# Altium PCB PCB_old.PcbDoc
Units mm, origin at the board's own origin, x right, y up, seen from the top; angles counter-clockwise.
Board outline 95.12 x 100.58 mm, 2 copper layers (Top Layer, Bottom Layer); 14 components, 22 nets, 91 pads, 8 vias.
Unrouted connection lines stored in the file: 22.
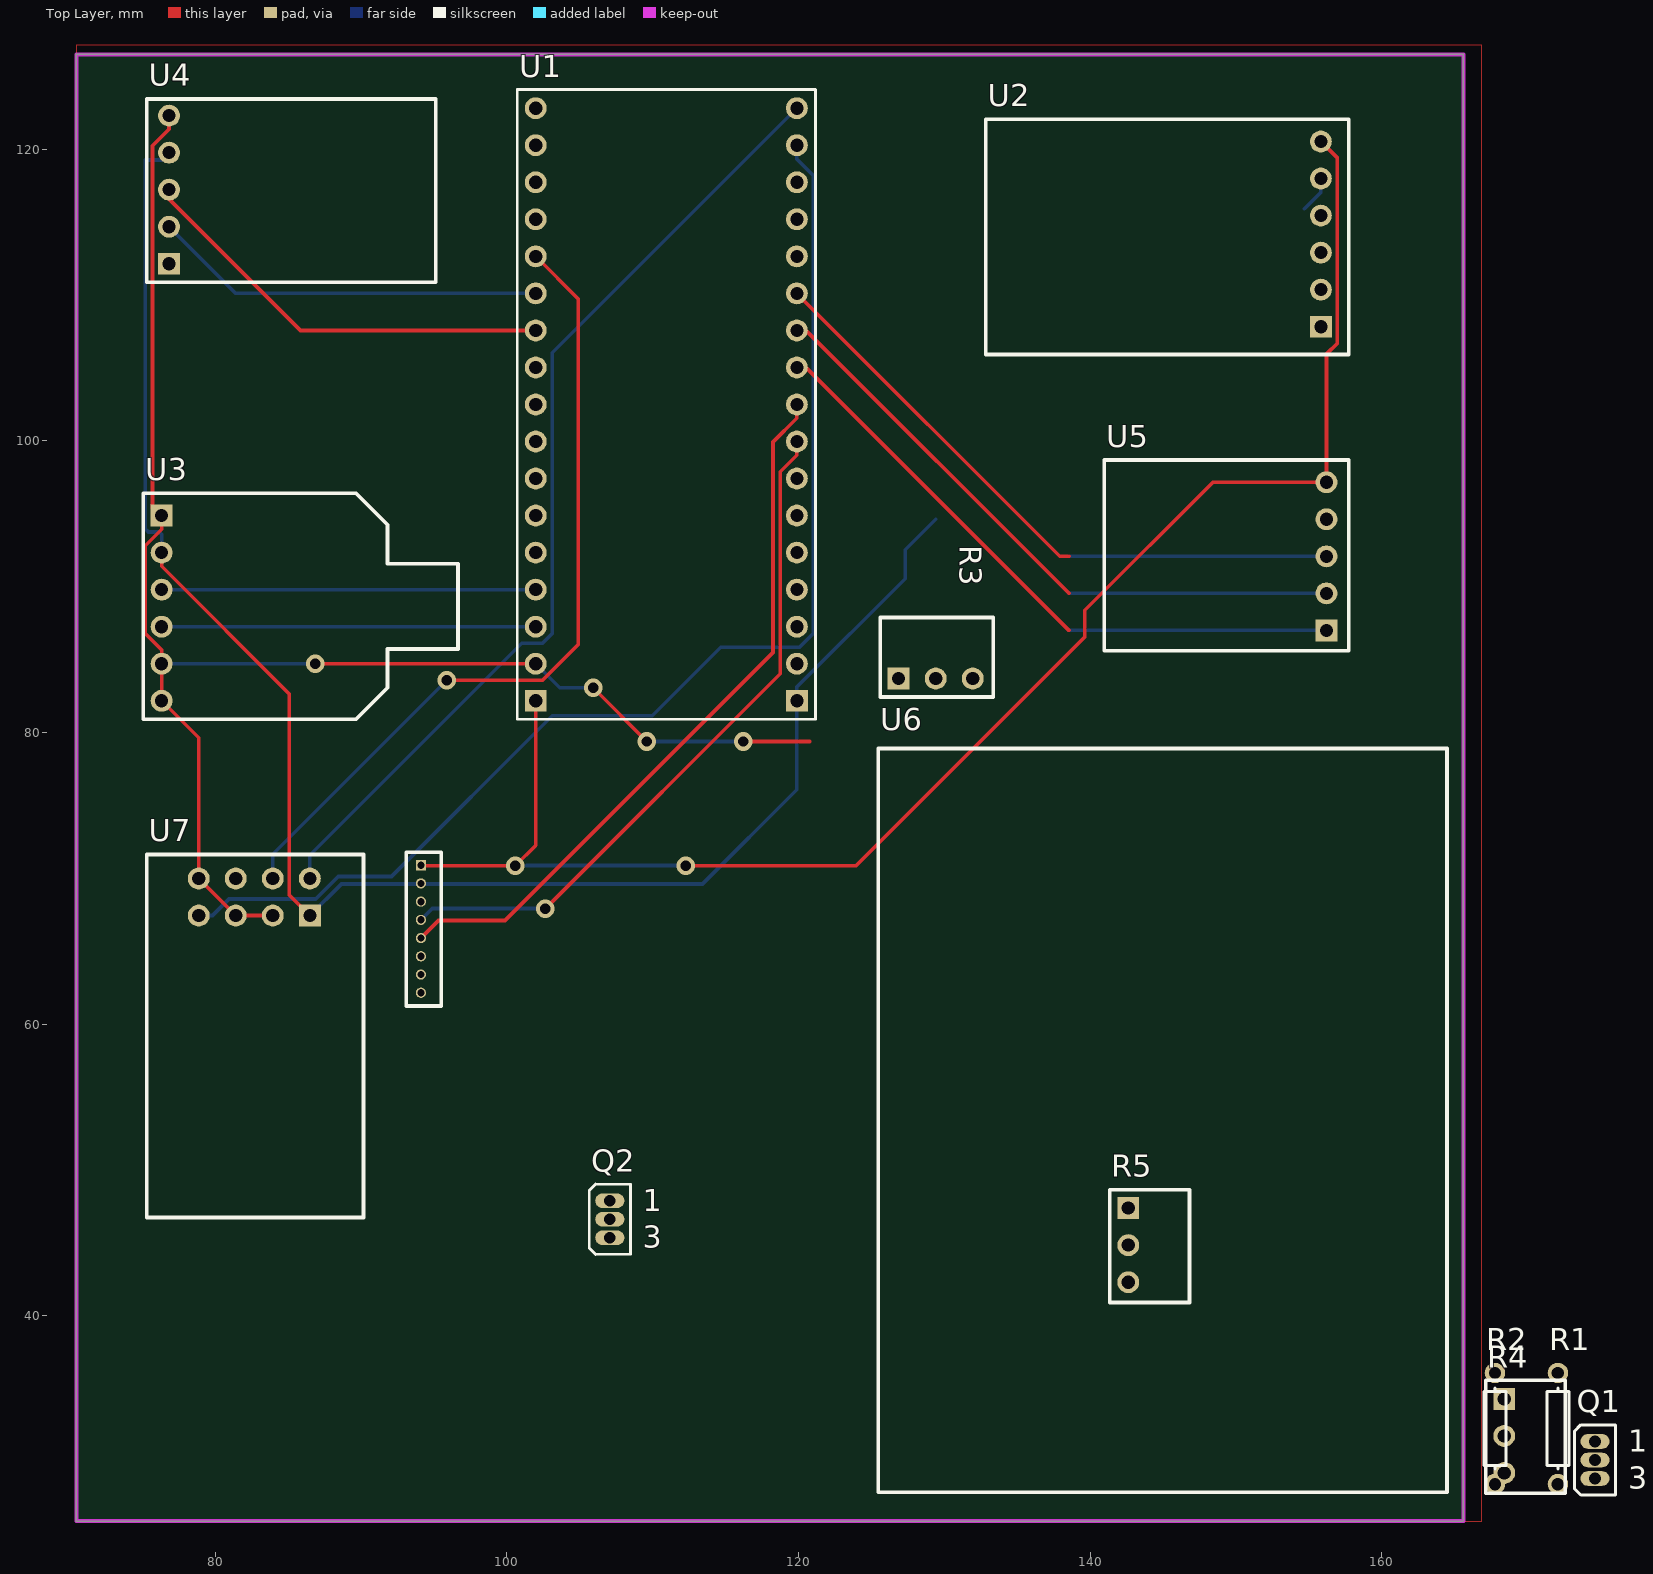
[diagram p0: Top Layer view]
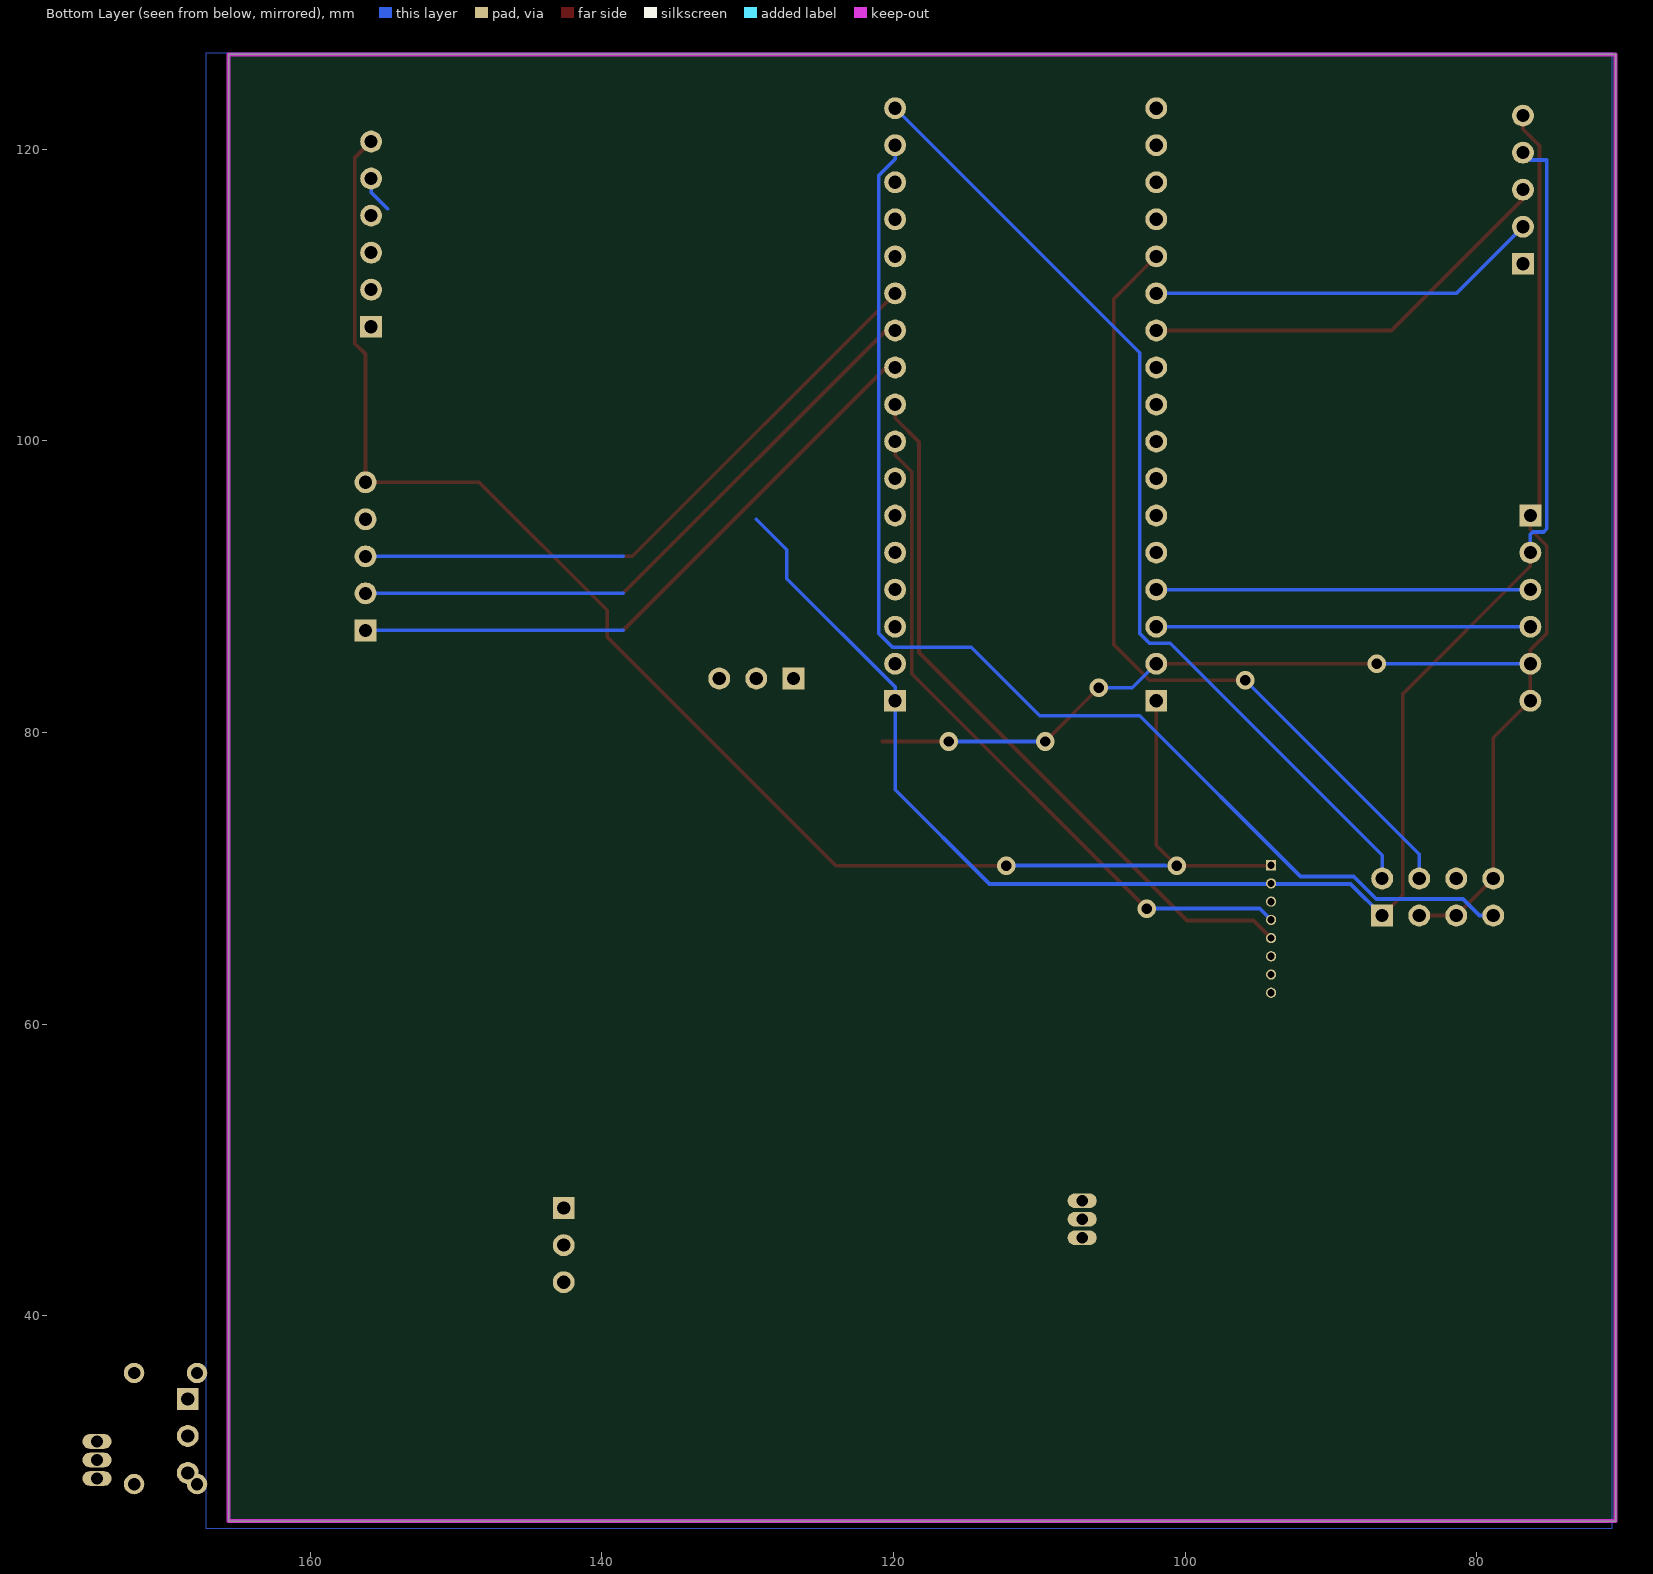
[diagram p1: Bottom Layer view, seen from below]

## Layer stack, top to bottom
Top Solder: solder mask 0.0102, Solder Resist, Dk 3.5
Top Layer: signal copper 0.0356
Dielectric 1: dielectric 0.32, FR-4, Dk 4.8
Bottom Layer: signal copper 0.0356
Bottom Solder: solder mask 0.0102, Solder Resist, Dk 3.5

## Board outline
70.485,25.908 70.485,126.492 165.608,126.492 165.608,25.908

## Design rules (kind name [scope] priority, off if disabled: settings)
Clearance [All] p1: gap=0.254 ignorepadtopadclearanceinfootprint=FALSE except(0: Arc-Hole Track-Hole SMDPad-Hole THPad-Hole Via-Hole Fill-Hole Poly-Hole Region-Hole Text-Hole)
PolygonConnect [All] p1: connectstyle=Relief reliefconductorwidth=0.254 reliefentries=4 polygonreliefangle="90 Angle" airgapwidth=0.254
RoomDefinition Schematics [InComponentClass('Schematics')] p1: confinementstyle=ConfineIn formatcopy=TRUE lockcomponents=FALSE outline 70.739,25.4 165.608,25.4 165.608,126.619 70.739,126.619
RoutingVias [All] p1: holewidth=0.711 width=1.27 viastyle="Through Hole" minholewidth=0.711 minwidth=1.27 maxholewidth=0.711 maxwidth=1.27
SolderMaskExpansion [All] p1: expansion=0.102
Width [All] p1: maxlimit=0.254 minlimit=0.254 preferedwidth=0.254
30 further rules are at their usual default settings.

## Components (designator, comment, footprint, x,y, rotation, side; value= is the part's Value field where it differs from the comment)
Q1 "MOSFET-N" E3 174.625,30.099 r0 top
Q2 "MOSFET-N" E3 107.061,46.609 r0 top
R1 "Res1" AXIAL-0.3 172.085,32.258 r90 top value=1K
R2 "Res1" AXIAL-0.3 167.767,32.258 r90 top value=1K
R3 "potentiometer" potentiometer 131.953,83.693 r90 top
R4 "potentiometer" potentiometer 168.402,29.21 r0 top
R5 "potentiometer" potentiometer 142.621,42.291 r0 top
U1 "STM32_Dev" STM32_Dev 100.584,103.505 r0 top
U2 "18650" 18650_Manage 155.829,107.823 r0 top
U3 "BME680_Dev" BME680_Dev 76.327,82.169 r0 top
U4 "ATGM336H_Dev" AGTM336H_Dev 76.835,112.141 r0 top
U5 "MiCS-6814_Dev" MiCS6814 156.21,97.155 r180 top
U6 "PMS5003" PMS5003 94.107,70.893 r180 top
U7 "esp01" ESP01 78.867,69.977 r270 top

## Footprints (in the part's own frame and the unit in brackets; to place one, negate y for a bottom-side part, rotate by r counter-clockwise, add the part's x,y. Pads: shape width x height; smd on the part's side, far side on the other; paste and mask are expansions set on the pad)
18650_Manage [mm]
  rect 1.5x1.5 hole 0.9: 1(0,0)
  round 1.5 hole 0.9: 2(0,2.54) 3(0,5.08) 4(0,7.62) 5(0,10.16) 6(0,12.7)
  silkscreen extent -22.99,-1.91 1.91,14.22
AGTM336H_Dev [mm]
  round 1.5 hole 0.9: 1(0,10.16) 2(0,7.62) 3(0,5.08) 4(0,2.54)
  rect 1.5x1.5 hole 0.9: 5(0,0)
  silkscreen extent -1.52,-1.27 18.29,11.3
AXIAL-0.3 [mm] "Axial Device, Thru-Hole; 2 Leads; 0.3 in Pin Spacing"
  round 1.4 hole 0.85: 1(-3.81,0) 2(3.81,0)
  silkscreen extent -2.77,-0.76 2.77,0.76
BME680_Dev [mm]
  rect 1.5x1.5 hole 0.9: 1(0,12.7)
  round 1.5 hole 0.9: 2(0,10.16) 3(0,7.62) 4(0,5.08) 5(0,2.54) 6(0,0)
  silkscreen extent -1.27,-1.27 20.32,14.22
E3 [mm] "TO, Flat Index; 3 In-Line, Axial Leads; Body Dia. 4.6mm; Lead Dia. 0.5 mm (max)"
  oval 2x1 hole 0.8: 1(0,1.27) 2(0,0) 3(0,-1.27)
  silkscreen extent -1.41,-2.41 1.41,2.41
ESP01 [mm]
  rect 1.5x1.5 hole 0.9: 1(2.54,7.62)
  round 1.5 hole 0.9: 2(2.54,5.08) 3(2.54,2.54) 4(2.54,0) 5(0,0) 6(0,2.54) 7(0,5.08) 8(0,7.62)
  silkscreen extent -1.65,-3.56 23.24,11.3
MiCS6814 [mm]
  rect 1.5x1.5 hole 0.9: 1(0,10.16)
  round 1.5 hole 0.9: 2(0,7.62) 3(0,5.08) 4(0,2.54) 5(0,0)
  silkscreen extent -1.52,-1.52 15.24,11.56
PMS5003 [mm] "Molex 1.25mm 8p"
  rect 0.7x0.7 hole 0.5: 1(0,0)
  round 0.7 hole 0.5: 2(0,1.25) 3(0,2.5) 4(0,3.75) 5(0,5) 6(0,6.25) 7(0,7.5) 8(0,8.75)
  silkscreen extent -70.37,-8 1.02,43
potentiometer [mm]
  rect 1.5x1.5 hole 0.9: 1(0,5.08)
  round 1.5 hole 0.9: 2(0,2.54) 3(0,0)
  silkscreen extent -1.27,-1.4 4.19,6.35
STM32_Dev [mm]
  round 1.5 hole 0.9: 1(19.304,19.304) 2(19.304,16.764) 3(19.304,14.224) 4(19.304,11.684) 5(19.304,9.144) 6(19.304,6.604) 7(19.304,4.064) 8(19.304,1.524) 9(19.304,-1.016) 10(19.304,-3.556) 11(19.304,-6.096) 12(19.304,-8.636) 13(19.304,-11.176) 14(19.304,-13.716) 15(19.304,-16.256) 16(19.304,-18.796) 19(1.397,-18.796) 20(1.397,-16.256) 21(1.397,-13.716) 22(1.397,-11.176) 23(1.397,-8.636) 24(1.397,-6.096) 25(1.397,-3.556) 26(1.397,-1.016) 27(1.397,1.524) 28(1.397,4.064) 29(1.397,6.604) 30(1.397,9.144) 31(1.397,11.684) 32(1.397,14.224) 33(1.397,16.764) 34(1.397,19.304)
  rect 1.5x1.5 hole 0.9: 17(19.304,-21.336) 18(1.397,-21.336)
  silkscreen extent 0.13,-22.61 20.57,20.57

## Part data
Q1 Q2: "N-Channel MOSFET", LatestRevisionDate=17-Jul-2002, LatestRevisionNote="Re-released for DXP Platform.", PackageDescription="TO, Flat Index; 3 In-Line, Axial Leads; Body Dia. 4.6mm; Lead Dia. 0.5 mm (max)", PackageReference=E3, PackageVersion=1995/1996, Published=8-Jun-2000, Publisher="Altium Limited"
R1 R2: "Resistor", LatestRevisionDate=17-Jul-2002, LatestRevisionNote="Re-released for DXP Platform.", PackageDescription="Axial Device, Thru-Hole; 2 Leads; 0.3 in Pin Spacing", PackageReference=AXIAL-0.3, Published=8-Jun-2000, Publisher="Altium Limited"

## Via types
v1: diameter 1.27, hole 0.711, Top Layer to Bottom Layer, 8 vias

## Nets (pads, with @x,y where several pads share a name; then routed paths per layer and width w, separated by ;. In a path a pad name is that pad's centre, name@x,y a point inside that pad or via, vN(x,y) a via of type N, cw(c..) or ccw(c..) an arc to the next point about the centre after c; other vN are vias at no path point)
3.3V: R3.1 R4.1 R5.1 U1.19 U3.1 U3.5 U3.6 U4.1 U7.2 U7.3 U7.5 | length 109.3
  Top Layer w0.254: U4.1 76.835,121.36 75.704,120.229 75.704,95.377 76.835,95.377 U3.1 76.327,93.928 75.196,92.797 75.196,86.781 76.327,85.65 U3.5 U3.6 78.867,79.629 U7.5 U7.3 U7.2 ; v1(86.868,84.709) U1.19 ; v1(105.918,83.058) v1(109.601,79.375) ; v1(116.205,79.375) 120.777,79.375
  Bottom Layer w0.254: U3.5 v1(86.868,84.709) v1@87.249,84.709 ; U1.19 103.632,83.058 v1(105.918,83.058) ; v1(109.601,79.375) v1(116.205,79.375)
+5: U1.18 U2.6 U5.5 U6.1 | length 109.4
  Top Layer w0.254: U6.1 94.147,70.853 v1(100.584,70.853) 101.981,72.25 U1.18 ; v1(112.268,70.866) 112.255,70.853 123.944,70.853 139.638,86.547 139.638,88.37 148.423,97.155 U5.5 156.21,105.942 156.96,106.692 156.96,119.392 U2.6
  Bottom Layer w0.254: 101.346,70.853 101.359,70.866 v1(112.268,70.866)
GND: Q1.3 Q2.3 R2.1 U1.17 U2.5 U3.2 U6.2 U7.1 | length 121.3
  Top Layer w0.254: U3.2 76.327,91.388 85.078,82.637 85.078,68.846 U7.1
  Bottom Layer w0.254: U3.2 76.327,93.569 76.158,93.738 75.419,93.738 75.196,93.961 75.196,119.253 76.327,119.253 76.835,119.761 ; U7.1 88.653,69.603 100.584,69.603 113.418,69.603 119.888,76.073 U1.17 119.888,83.11 127.316,90.538 127.316,92.523 129.408,94.615 ; 154.698,115.911 155.829,117.042 U2.5 ; 155.829,94.996 156.21,94.615
NetQ1_1: Q1.1 U4.2
NetQ2_1: Q2.1 U5.4
NetR1_2: R1.2 U2.4
PA1: Q2.2 U1.11
PA2: U1.10 U6.4 | length 48
  Top Layer w0.254: v1(102.646,67.915) 118.757,84.026 118.757,97.877 119.888,99.008 U1.10
  Bottom Layer w0.254: U6.4 94.879,67.915 v1(102.646,67.915)
PA3: U1.9 U6.5 | length 49.9
  Top Layer w0.254: U6.5 95.317,67.103 99.869,67.103 118.249,85.483 118.249,99.909 119.888,101.548 U1.9
PA4: R3.2 U1.8 U5.1 | length 43.8
  Top Layer w0.254: U1.8 120.523,105.029 138.557,86.995
  Bottom Layer w0.254: 138.557,86.995 U5.1
PA5: R4.2 U1.7 U5.2 | length 43.8
  Top Layer w0.254: U1.7 120.523,107.569 138.557,89.535
  Bottom Layer w0.254: 138.557,89.535 U5.2
PA6: R5.2 U1.6 U5.3 | length 43.8
  Top Layer w0.254: U1.6 137.922,92.075 138.557,92.075
  Bottom Layer w0.254: 138.557,92.075 U5.3
PA7: R1.1 R2.2 U1.5
PA8: U1.30 U7.7 | length 56.6
  Top Layer w0.254: v1@95.643,83.578 v1(95.885,83.578) 102.449,83.578 104.876,86.005 ; U1.30 104.902,109.728 104.902,86.005
  Bottom Layer w0.254: U7.7 83.947,71.64 v1(95.885,83.578)
PA9: U1.29 U4.4 | length 27
  Bottom Layer w0.254: U4.4 81.407,110.109 U1.29
PA10: U1.28 U4.3 | length 29.5
  Top Layer w0.254: U4.3 76.835,116.586 85.852,107.569 U1.28
PB6: U1.21 U3.3 | length 25.7
  Bottom Layer w0.254: U3.3 U1.21
PB7: U1.20 U3.4 | length 25.7
  Bottom Layer w0.254: U3.4 U1.20
PB10: U1.2 U7.4 | length 84.1
  Bottom Layer w0.254: U7.4 79.808,67.437 80.939,68.568 86.9,68.568 88.443,70.111 92.086,70.111 103.112,81.137 109.966,81.137 114.669,85.84 120.078,85.84 121.019,86.781 121.019,118.197 119.888,119.328 U1.2
PB11: U1.1 U7.8 | length 67.5
  Bottom Layer w0.254: U7.8 86.487,71.576 101.029,86.118 102.449,86.118 103.112,86.781 103.112,106.033 U1.1
PB14: Q1.2 U1.32
PB15: U1.31 U6.3
pads on no net: R3.3 R4.3 R5.3 U1.3 U1.4 U1.12 U1.13 U1.14 U1.15 U1.16 U1.22 U1.23 U1.24 U1.25 U1.26 U1.27 U1.33 U1.34 U2.1 U2.2 U2.3 U4.5 U6.6 U6.7 U6.8 U7.6

## Polygon pours and split planes (outlines as drawn)
+5 on Top Layer "Top Layer-+5" (solid, pour order 6): 70.485,25.908 166.878,25.908 166.878,127.127 70.485,127.127
GND on Bottom Layer "Bottom Layer-GND" (solid, pour order 8): 70.739,126.619 70.739,25.4 167.132,25.4 167.132,126.619

## Keep-outs
Keep-Out Layer:
  the board outline again, w0.254

## Text inside footprints (layer, text, board x,y; h text height)
Q1: Top Overlay "1" at 176.9,30.654 h1.5; Top Overlay "3" at 176.9,28.136 h1.5
Q2: Top Overlay "1" at 109.336,47.164 h1.5; Top Overlay "3" at 109.336,44.646 h1.5